# EAGLE board PCB_Schema_Electrica (EAGLE 9.7.0)
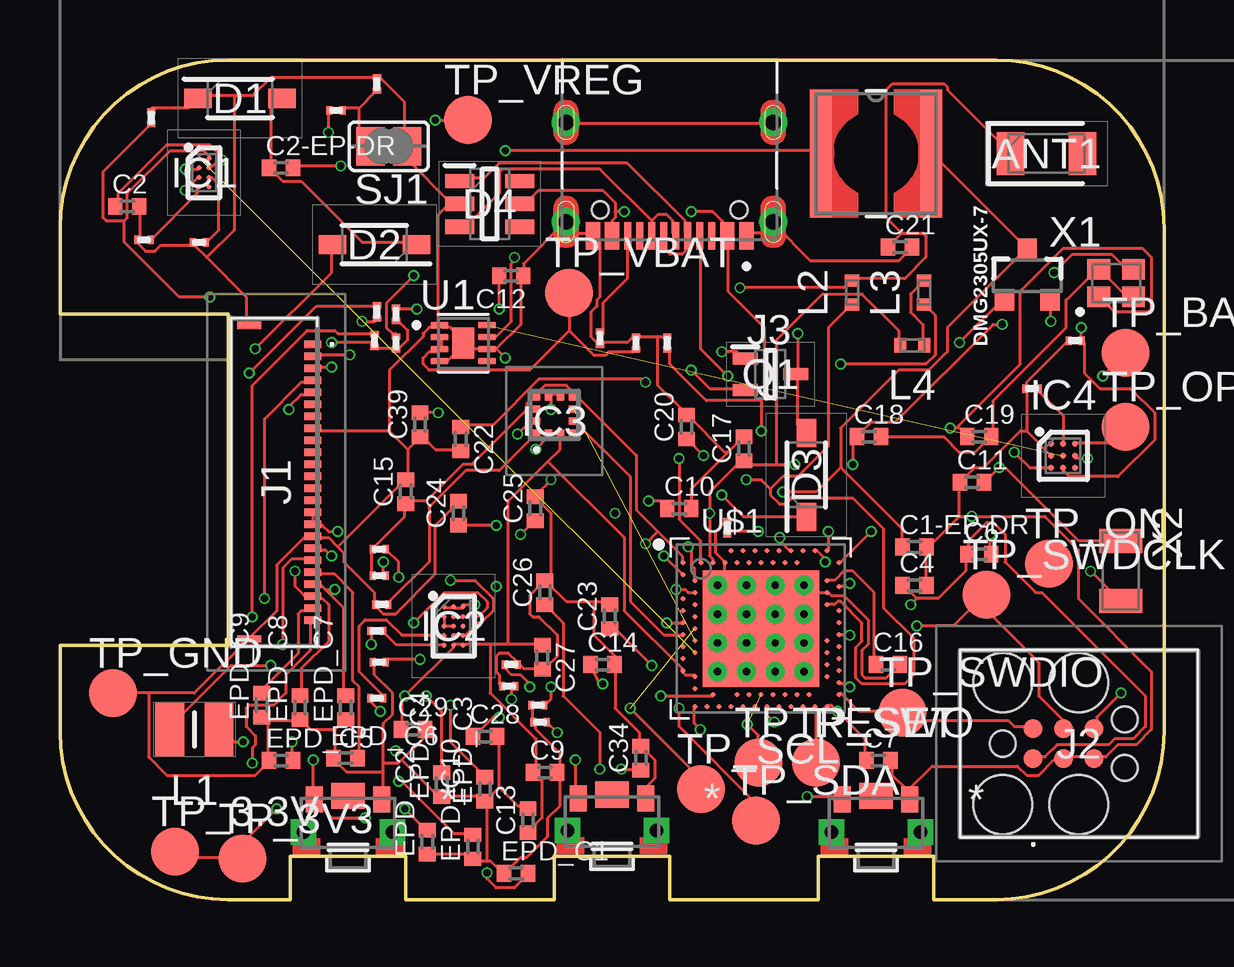
[diagram p0: board, top side]
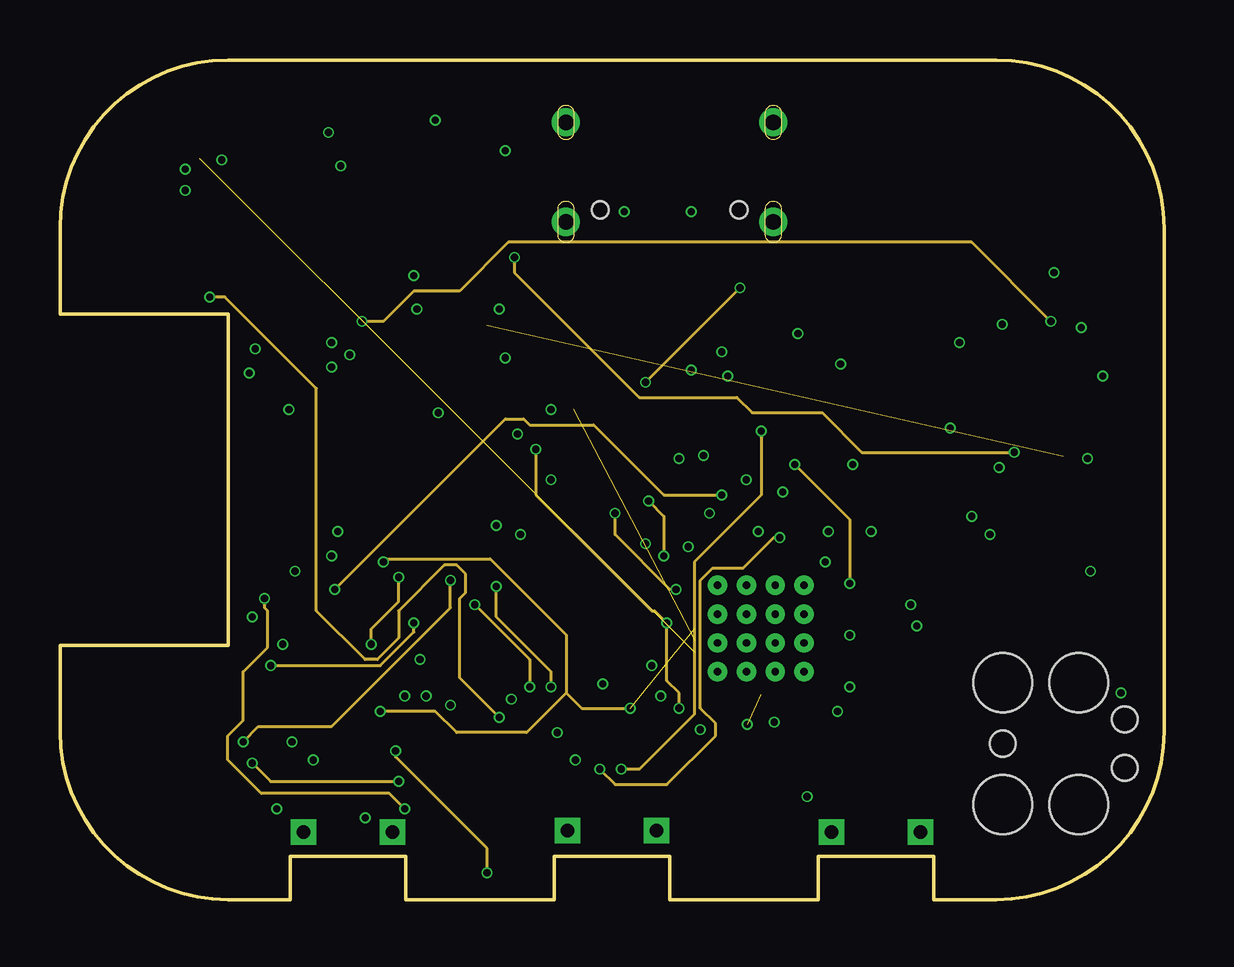
[diagram p1: board, inner layer Route15]
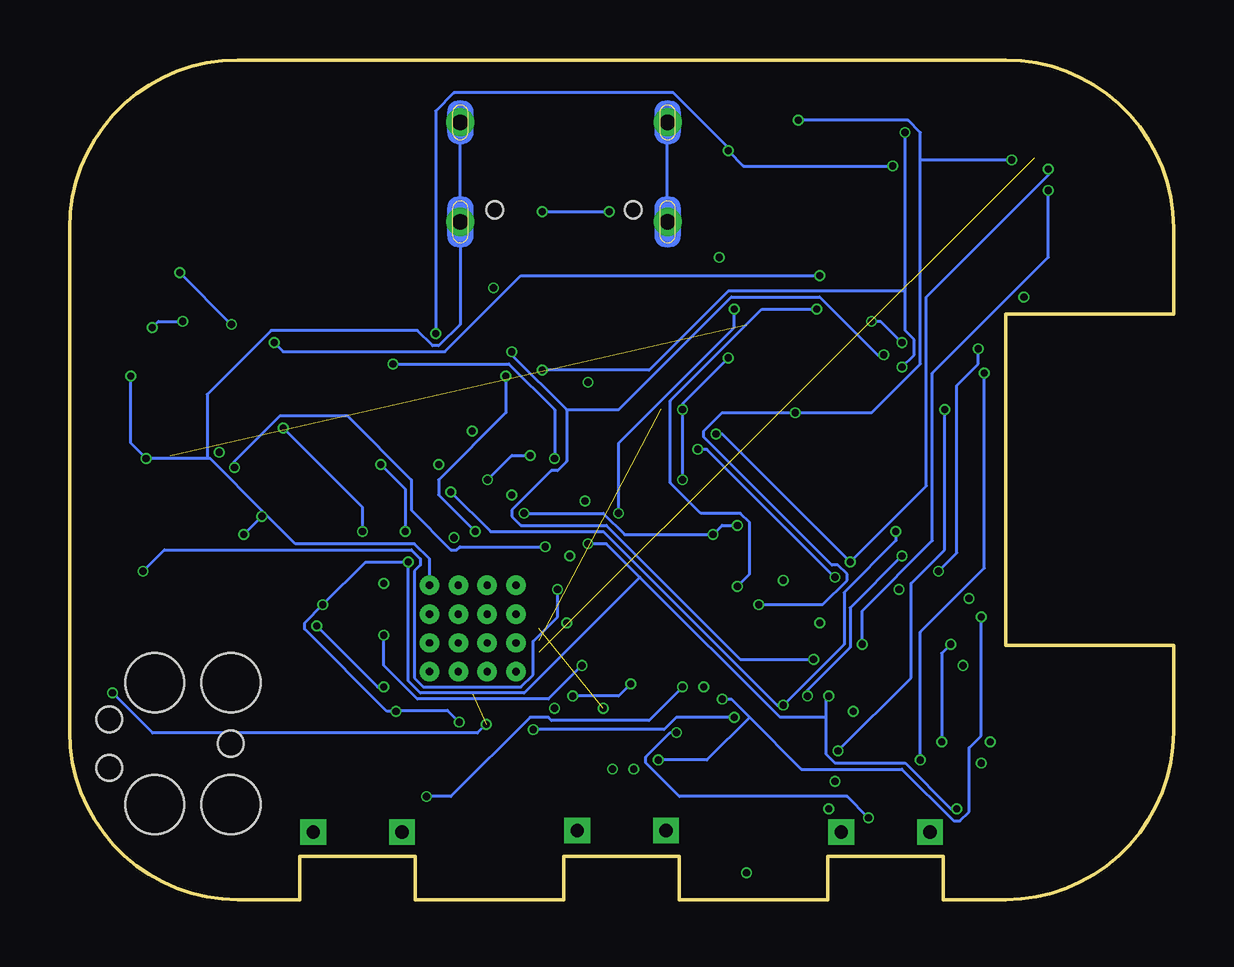
[diagram p2: board, bottom side, seen from below]

Size 46 x 35 mm. Coordinates in mm from the lower left corner, seen from the top.
Outline: 39,0 36.4,0 36.4,1.8 31.6,1.8 31.6,0 25.4,0 25.4,1.8 20.6,1.8 20.6,0 14.4,0 14.4,1.8 9.6,1.8 9.6,0 7,0 arc-90 0,7 0,10.6 7,10.6 7,24.4 0,24.4 0,28 arc-90 7,35 39,35 arc-90 46,28 46,7 arc-90 39,0
Copper layers (1+2*15+16): Top 0.035mm / dielectric 1.6mm / Route2 0.035mm / dielectric 0.15mm / Route15 0.035mm / dielectric 0.2mm / Bottom 0.035mm
Design rules "jlcpcb-2layers.dru *": minimum track width 5mil, minimum drill 0.2mm, track to track 5mil, track to pad 5mil, pad to pad 5mil, via to via 5mil, smd to smd 5mil, copper to edge 0.2mm, drill to drill 6mil, minimum pad ring 10mil, minimum via ring 3mil, stop-mask expansion 4mil, vias tented up to drill 999mm, thermal gap 10mil

## Footprints (pad centres in the part's own frame; a part is rotated, then mirrored left to right if it is on the bottom)
2450AT18B100E_ANTC3216X140N = smd 1.15 x 1.8: 1 -1.5,0; 2 1.5,0
GRM011R60J152KE01L_1_0201 = smd 0.35 x 0.25: 1 0,0.275; 2 0,-0.275
PERFECT_0402_0402 = smd 0.6 x 0.7: 1 -0.5,0; 2 0.5,0
ESP32_C6_LIBRARY_5_SOD3716X135N = smd 1.15 x 0.8: 1 -1.75,0; 2 1.75,0
ESP32_C6_LIBRARY_3_SOT95P280X145-6N = smd 1.2 x 0.6: 1 -1.25,0.95; 2 -1.25,0; 3 -1.25,-0.95; 4 1.25,-0.95; 5 1.25,0; 6 1.25,0.95
ESP32_C6_LIBRARY_4_ESP32_C6_LIBRARY_4_ESP32_C6_LIBRARY_4_ESP32_C6_LIBRARY_4_ESP32_WROVER_SPARKFUN-DISCRETESEMI_SOT23-3 = smd 0.8 x 0.9: 1 -0.95,-1; 2 0.95,-1; 3 0,1.1
BQ25180YBGR_BGA8C40P2X4_100X155X50 = smd 0.2 x 0.2: A1 -0.2,0.6; A2 0.2,0.6; B1 -0.2,0.2; B2 0.2,0.2; C1 -0.2,-0.2; C2 0.2,-0.2; D1 -0.2,-0.6; D2 0.2,-0.6
RT6160AWSC_BGA15C40P3X5_140X230X60 = smd 0.216 x 0.216: A1 -0.4,0.8; A2 0,0.8; A3 0.4,0.8; B1 -0.4,0.4; B2 0,0.4; B3 0.4,0.4; C1 -0.4,0; C2 0,0; C3 0.4,0; D1 -0.4,-0.4; D2 0,-0.4; D3 0.4,-0.4; E1 -0.4,-0.8; E2 0,-0.8; E3 0.4,-0.8
BMA423_BMA423 = smd 0.3 x 0.35: 1 -0.75,-0.775; 2 -0.25,-0.775; 3 0.25,-0.775; 4 0.75,-0.775; 7 0.75,0.775; 8 0.25,0.775; 9 -0.25,0.775; 10 -0.75,0.775 | smd 0.35 x 0.3: 5 0.775,-0.25; 6 0.775,0.25; 11 -0.775,0.25; 12 -0.775,-0.25
DRV2605YZFR_BGA9C50P3X3_144X144X62 = smd 0.25 x 0.25: A1 -0.5,0.5; A2 0,0.5; A3 0.5,0.5; B1 -0.5,0; B2 0,0; B3 0.5,0; C1 -0.5,-0.5; C2 0,-0.5; C3 0.5,-0.5
503480-2400_5034802400 = smd 0.3 x 0.7: 1 -5.75,1.525; 2 -5.25,1.525; 3 -4.75,1.525; 4 -4.25,1.525; 5 -3.75,1.525; 6 -3.25,1.525; 7 -2.75,1.525; 8 -2.25,1.525; 9 -1.75,1.525; 10 -1.25,1.525; 11 -0.75,1.525; 12 -0.25,1.525; 13 0.25,1.525; 14 0.75,1.525; 15 1.25,1.525; 16 1.75,1.525; 17 2.25,1.525; 18 2.75,1.525; 19 3.25,1.525; 20 3.75,1.525; 21 4.25,1.525; 22 4.75,1.525; 23 5.25,1.525; 24 5.75,1.525 | smd 0.3 x 1: MP1 -6.54,-1.125; MP2 6.54,-1.125
TC2030-IDC_TC2030IDC = smd 0.783 x 0.783: 1 -0.953,-0.635; 2 -0.953,0.635; 3 0.317,-0.635; 4 0.317,0.635; 5 1.588,-0.635; 6 1.588,0.635 | hole 2.451: -2.223,-2.54; -2.223,2.54; 0.952,-2.54; 0.952,2.54 | hole 1.067: -2.223,0; 2.857,-1.016; 2.857,1.016
KH-TYPE-C-16P_KINGHELM_KH-TYPE-C-16P = smd 0.6 x 1.15: A1_B12 -3.2,4.725; A4_B9 -2.4,4.725; A9_B4 2.4,4.725; A12_B1 3.2,4.725 | smd 0.3 x 1.15: A5 -1.25,4.725; A6 -0.25,4.725; A7 0.25,4.725; A8 1.25,4.725; B5 1.75,4.725; B6 0.75,4.725; B7 -0.75,4.725; B8 -1.75,4.725 | drill 0.65 pad 1.05: SH1 -4.32,0; SH2 4.32,0; SH3 -4.32,4.15; SH4 4.32,4.15 | hole 0.7: -2.89,3.65; 2.89,3.65
MLP2016SR47MT0S1_INDC2016X100N = smd 1.2 x 2.2: 1 -1.028,0; 2 1.028,0
NORDIC_NRF_2_RESC0402_L = smd 0.5 x 0.6: 1 -0.5,0; 2 0.5,0
ESP32_C6_LIBRARY_2_IND_4828-WE-TPC_WRE = smd 0.9 x 5.3: 1 -2.286,0; 2 2.286,0
ESP32_C6_LIBRARY_6_SOT65P210X110-3N = smd 1.05 x 0.5: 1 -1.05,0.65; 2 -1.05,-0.65; 3 1.05,0
CPF0201D7K68C1_0201 = smd 0.35 x 0.25: 1 0,0.275; 2 0,-0.275
ERA-1AEB3401C_0201 = smd 0.35 x 0.25: 1 0,0.275; 2 0,-0.275
ESP32_C6_LIBRARY_7_JUMPER_SJ = smd 1.168 x 1.6: 1 -0.762,0; 2 0.762,0
2025-10-22_07-23-44_LIBRARY_SW_EVP-AKE31A_PAN = smd 0.711 x 1.092: 1 -1.4,-0.972; 2 1.4,-0.972 | drill 0.559 pad 0.914 square: 3 -1.848,0.381; 4 1.848,0.381 | smd 1.397 x 1.092: 5 0,-1.124
HECTOR_WATCH_1_TP20R = smd 2 x 2: TP 0,0
ESP32_C6_LIBRARY_SON50P200X200X80-9N = smd 0.76 x 0.27: 1 -0.985,0.75; 2 -0.985,0.25; 3 -0.985,-0.25; 4 -0.985,-0.75; 5 0.985,-0.75; 6 0.985,-0.25; 7 0.985,0.25; 8 0.985,0.75 | smd 0.9 x 1.3: 9 0,0
NORDIC_NRF_4_AQFN50P700X700X85_HS-74N = smd 4.85 x 4.85: P$74 0,0 | drill 0.3 pad 0.6: P$75 -1.8,1.8; P$76 -0.6,1.8; P$77 0.6,1.8; P$78 1.8,1.8; P$79 -1.8,0.6; P$80 -0.6,0.6; P$81 0.6,0.6; P$82 1.8,0.6; P$83 -1.8,-0.6; P$84 -0.6,-0.6; P$85 0.6,-0.6; P$86 1.8,-0.6; P$87 -1.8,-1.8; P$88 -0.6,-1.8; P$89 0.6,-1.8; P$90 1.8,-1.8 | smd 0.2 x 0.2: P$A8 -1.25,3.25; P$A10 -0.75,3.25; P$A12 -0.25,3.25; P$A14 0.25,3.25; P$A16 0.75,3.25; P$A18 1.25,3.25; P$A20 1.75,3.25; P$A22 2.25,3.25; P$A23 2.75,3.25; P$AA24 3.25,-2.25; P$AB2 -2.75,-2.5; P$AC5 -2,-2.75; P$AC9 -1,-2.75; P$AC11 -0.5,-2.75; P$AC13 0,-2.75; P$AC15 0.5,-2.75; P$AC17 1,-2.75; P$AC19 1.5,-2.75; P$AC21 2,-2.75; P$AC24 3.25,-2.75; P$AD2 -2.75,-3.25; P$AD4 -2.25,-3.25; P$AD6 -1.75,-3.25; P$AD8 -1.25,-3.25; P$AD10 -0.75,-3.25; P$AD12 -0.25,-3.25; P$AD14 0.25,-3.25; P$AD16 0.75,-3.25; P$AD18 1.25,-3.25; P$AD20 1.75,-3.25; P$AD22 2.25,-3.25; P$AD23 2.75,-3.25; P$B1 -3.25,2.75; P$B3 -2.5,2.75; P$B5 -2,2.75; P$B7 -1.5,2.75; P$B9 -1,2.75; P$B11 -0.5,2.75; P$B13 0,2.75; P$B15 0.5,2.75; P$B17 1,2.75; P$B19 1.5,2.75; P$B24 3.25,2.75; P$C1 -3.25,2.25; P$D2 -2.75,2; P$D23 2.75,2; P$E24 3.25,1.75; P$F2 -2.75,1.5; P$F23 2.75,1.5; P$G1 -3.25,1.25; P$H2 -2.75,1; P$H23 2.75,1; P$J1 -3.25,0.75; P$J24 3.25,0.75; P$K2 -2.75,0.5; P$L1 -3.25,0.25; P$L24 3.25,0.25; P$M2 -2.75,0; P$N1 -3.25,-0.25; P$N24 3.25,-0.25; P$P2 -2.75,-0.5; P$P23 2.75,-0.5; P$R1 -3.25,-0.75; P$R24 3.25,-0.75; P$T2 -2.75,-1; P$T23 2.75,-1; P$U1 -3.25,-1.25; P$U24 3.25,-1.25; P$V23 2.75,-1.5; P$W1 -3.25,-1.75; P$W24 3.25,-1.75; P$Y2 -2.75,-2; P$Y23 2.75,-2
NORDIC_NRF_BT-XTAL_2016_N = smd 0.95 x 0.85: 1 -0.725,-0.575; 2 0.725,-0.575; 3 0.725,0.575; 4 -0.725,0.575
NORDIC_NRF_1_XTAL_3215_N = smd 1 x 1.8: 1 -1.25,0; 2 1.25,0

## Placement (x,y rotation side)
ANT1  2450AT18B100E  [2450AT18B100E_ANTC3216X140N]  41.1,31.1 0 top
C1  1uF  [GRM011R60J152KE01L_1_0201]  3.8,32.6 0 top
C1-EP-DR  10uF  [PERFECT_0402_0402]  35.6,14.7 0 top
C2  1uF  [PERFECT_0402_0402]  2.8,28.9 0 top
C2-EP-DR  4.7uF/25V  [PERFECT_0402_0402]  9.2,30.5 0 top
C3  1uF  [GRM011R60J152KE01L_1_0201]  5.8,27.4 90 top
C4  100nF  [PERFECT_0402_0402]  35.6,13.1 0 top
C6  22uF  [PERFECT_0402_0402]  38.3,14.4 0 top
C7  22uF  [PERFECT_0402_0402]  34.1,5.8 0 top
C9  4.7µF  [PERFECT_0402_0402]  20.2,5.3 0 top
C10  100nF  [PERFECT_0402_0402]  25.8,16.3 0 top
C11  12pF  [PERFECT_0402_0402]  38,17.4 0 top
C12  12pF  [PERFECT_0402_0402]  18.8,26 180 top
C13  4.7µF  [PERFECT_0402_0402]  19.5,3.3 90 top
C14  4.7µF  [PERFECT_0402_0402]  22.6,9.8 0 top
C15  100nF  [PERFECT_0402_0402]  14.4,17 90 top
C16  100nF  [PERFECT_0402_0402]  34.5,9.8 0 top
C17  N.C.  [PERFECT_0402_0402]  28.5,18.8 90 top
C18  12pF  [PERFECT_0402_0402]  33.7,19.3 0 top
C19  12pF  [PERFECT_0402_0402]  38.3,19.3 0 top
C20  1pF  [PERFECT_0402_0402]  26.1,19.7 90 top
C21  1pF  [PERFECT_0402_0402]  35,27.2 0 top
C22  N.C.  [PERFECT_0402_0402]  16.7,19.2 270 top
C23  820pF  [PERFECT_0402_0402]  22.9,11.8 90 top
C24  1.0µF  [PERFECT_0402_0402]  16.6,16.1 90 top
C25  47µF  [PERFECT_0402_0402]  19.8,16.3 90 top
C26  N.C.  [PERFECT_0402_0402]  20.2,12.8 90 top
C27  100nF  [PERFECT_0402_0402]  20.1,10.1 270 top
C28  4.7µF  [PERFECT_0402_0402]  17.7,6.8 0 top
C29  4.7µF  [PERFECT_0402_0402]  14.7,7.1 0 top
C30  1uF  [GRM011R60J152KE01L_1_0201]  40.5,21.3 90 top
C31  0.1uF  [GRM011R60J152KE01L_1_0201]  42.3,23.3 90 top
C32  0.1uF  [GRM011R60J152KE01L_1_0201]  24,23.2 0 top
C33  0.1uF  [GRM011R60J152KE01L_1_0201]  25.3,23.2 0 top
C34  4.7µF  [PERFECT_0402_0402]  24.2,5.9 90 top
C35  1uF  [GRM011R60J152KE01L_1_0201]  20,7.4 90 top
C36  1uF  [GRM011R60J152KE01L_1_0201]  19.9,8.1 90 top
C37  1uF  [GRM011R60J152KE01L_1_0201]  18.7,8.9 90 top
C38  1uF  [GRM011R60J152KE01L_1_0201]  18.8,9.8 90 top
C39  1uF  [PERFECT_0402_0402]  15,19.8 90 top
D1  MBR0530  [ESP32_C6_LIBRARY_5_SOD3716X135N]  7.5,33.4 0 top
D2  MBR0530  [ESP32_C6_LIBRARY_5_SOD3716X135N]  13.1,27.3 180 top
D3  MBR0530  [ESP32_C6_LIBRARY_5_SOD3716X135N]  31.1,17.7 90 top
D4  USBLC6-2SC6Y  [ESP32_C6_LIBRARY_3_SOT95P280X145-6N]  17.9,29 0 top
DMG2305UX-7  20V/4.2A/52mΩ/1.4W  [ESP32_C6_LIBRARY_4_ESP32_C6_LIBRARY_4_ESP32_C6_LIBRARY_4_ESP32_C6_LIBRARY_4_ESP32_WROVER_SPARKFUN-DISCRETESEMI_SOT23-3]  40.3,26 0 top
EPD_C1  1uF/50V  [PERFECT_0402_0402]  19,1.1 0 top
EPD_C2  1uF/50V  [PERFECT_0402_0402]  15.3,2.4 90 top
EPD_C3  0.1uF/50V  [PERFECT_0402_0402]  17.7,4.6 90 top
EPD_C4  1uF/50V  [PERFECT_0402_0402]  15.9,4.8 90 top
EPD_C5  1uF/50V  [PERFECT_0402_0402]  9.2,5.8 0 top
EPD_C6  1uF/50V  [PERFECT_0402_0402]  11.9,5.9 0 top
EPD_C7  1uF/50V  [PERFECT_0402_0402]  11.9,8 90 top
EPD_C8  1uF/50V  [PERFECT_0402_0402]  10,8 90 top
EPD_C9  1uF/50V  [PERFECT_0402_0402]  8.4,8.1 90 top
EPD_C10  1uF/50V  [PERFECT_0402_0402]  17.2,2.2 90 top
IC1  BQ25180YBGR_BQ25180YBGR  [BQ25180YBGR_BGA8C40P2X4_100X155X50]  6,30.3 0 top
IC2  RT6160AWSC_RT6160AWSC  [RT6160AWSC_BGA15C40P3X5_140X230X60]  16.4,11.4 0 top
IC3  BMA423_BMA423  [BMA423_BMA423]  20.6,20.2 0 top
IC4  DRV2605YZFR  [DRV2605YZFR_BGA9C50P3X3_144X144X62]  41.8,18.5 0 top
J1  503480-2400_503480-2400  [503480-2400_5034802400]  9,17.4 270 top
J2  TC2030-IDC  [TC2030-IDC_TC2030IDC]  41.5,6.5 0 top
J3  KH-TYPE-C-16P  [KH-TYPE-C-16P_KINGHELM_KH-TYPE-C-16P]  25.4,32.4 180 top
L1  MLP2016SR47MT0S1_FTC252012SR47MBCA  [MLP2016SR47MT0S1_INDC2016X100N]  5.6,7.1 0 top
L2  3.9nH  [NORDIC_NRF_2_RESC0402_L]  33,25.3 90 top
L3  10µH  [NORDIC_NRF_2_RESC0402_L]  36,25.3 90 top
L4  15µH  [NORDIC_NRF_2_RESC0402_L]  35.5,23.1 180 top
L5  68uH  [ESP32_C6_LIBRARY_2_IND_4828-WE-TPC_WRE]  34,31.1 0 top
Q1  SI1308EDL-T1-GE3  [ESP32_C6_LIBRARY_6_SOT65P210X110-3N]  29.6,21.9 0 top
R1  10K  [CPF0201D7K68C1_0201]  3.5,27.5 90 top
R1_EP_DR  0.47  [CPF0201D7K68C1_0201]  11.5,32.9 270 top
R1_USB  5K1  [CPF0201D7K68C1_0201]  27.8,15.5 0 top
R1_USB1  5K1  [CPF0201D7K68C1_0201]  22.5,23.4 0 top
R2  0  [CPF0201D7K68C1_0201]  13.2,8.4 90 top
R2_EP_DR  10K  [CPF0201D7K68C1_0201]  13.3,9.9 90 top
R3  0  [CPF0201D7K68C1_0201]  13.2,11.2 90 top
R4  0  [ERA-1AEB3401C_0201]  13.4,12.3 90 top
R5  3K3  [CPF0201D7K68C1_0201]  13.3,13.5 90 top
R6  3K3  [CPF0201D7K68C1_0201]  13.3,14.6 90 top
R7  10k  [ERA-1AEB3401C_0201]  13.2,24.5 0 top
R8  10k  [ERA-1AEB3401C_0201]  14,24.4 0 top
R9  10k  [ERA-1AEB3401C_0201]  13.1,23.3 0 top
R_PWR_EPD  10K  [CPF0201D7K68C1_0201]  14,23.2 0 top
R_TYPE_SEL  2.2  [CPF0201D7K68C1_0201]  13.2,34 0 top
SJ1  [ESP32_C6_LIBRARY_7_JUMPER_SJ]  13.7,31.4 180 top
SW1  2025-10-22_07-23-44_LIBRARY_EVP-AKE31ASW_EVP-AKE31A_PAN  [2025-10-22_07-23-44_LIBRARY_SW_EVP-AKE31A_PAN]  12,3.2 180 top
SW2  2025-10-22_07-23-44_LIBRARY_EVP-AKE31ASW_EVP-AKE31A_PAN  [2025-10-22_07-23-44_LIBRARY_SW_EVP-AKE31A_PAN]  34,3.2 180 top
SW3  2025-10-22_07-23-44_LIBRARY_EVP-AKE31ASW_EVP-AKE31A_PAN  [2025-10-22_07-23-44_LIBRARY_SW_EVP-AKE31A_PAN]  23,3.25 180 top
TP_3.3V  HECTOR_WATCH_1_TPTP20R  [HECTOR_WATCH_1_TP20R]  4.8,2 0 top
TP_3V3  HECTOR_WATCH_1_TPTP20R  [HECTOR_WATCH_1_TP20R]  7.6,1.7 0 top
TP_BAT_GND  HECTOR_WATCH_1_TPTP20R  [HECTOR_WATCH_1_TP20R]  44.4,22.8 0 top
TP_GND  HECTOR_WATCH_1_TPTP20R  [HECTOR_WATCH_1_TP20R]  2.2,8.6 0 top
TP_ON  HECTOR_WATCH_1_TPTP20R  [HECTOR_WATCH_1_TP20R]  41.2,14 0 top
TP_OP  HECTOR_WATCH_1_TPTP20R  [HECTOR_WATCH_1_TP20R]  44.4,19.7 0 top
TP_RESET  HECTOR_WATCH_1_TPTP20R  [HECTOR_WATCH_1_TP20R]  29.1,5.7 0 top
TP_SCL  HECTOR_WATCH_1_TPTP20R  [HECTOR_WATCH_1_TP20R]  26.7,4.6 0 top
TP_SDA  HECTOR_WATCH_1_TPTP20R  [HECTOR_WATCH_1_TP20R]  29,3.3 0 top
TP_SWDCLK  HECTOR_WATCH_1_TPTP20R  [HECTOR_WATCH_1_TP20R]  38.6,12.7 0 top
TP_SWDIO  HECTOR_WATCH_1_TPTP20R  [HECTOR_WATCH_1_TP20R]  35.1,7.8 0 top
TP_SWO  HECTOR_WATCH_1_TPTP20R  [HECTOR_WATCH_1_TP20R]  31.5,5.7 0 top
TP_VBAT  HECTOR_WATCH_1_TPTP20R  [HECTOR_WATCH_1_TP20R]  21.2,25.3 0 top
TP_VREG  HECTOR_WATCH_1_TPTP20R  [HECTOR_WATCH_1_TP20R]  17,32.5 0 top
U1  MAX17048G+T10  [ESP32_C6_LIBRARY_SON50P200X200X80-9N]  16.8,23.2 0 top
U$1  NRF52840_QF  [NORDIC_NRF_4_AQFN50P700X700X85_HS-74N]  29.2,11.3 0 top
X1  32MHz  [NORDIC_NRF_BT-XTAL_2016_N]  44,25.7 0 top
X2  32.768kHz  [NORDIC_NRF_1_XTAL_3215_N]  44.2,13.7 270 top

## Library data of the parts
ANT1 = InkTime_v5; ARROW_PART_NUMBER: 2450AT18B100E; ARROW_PRICE-STOCK: https://www.arrow.com/en/products/2450at18b100e/johanson-dielectrics?utm_currency=USD&region=nac; DESCRIPTION: Antennas 2.45GHz ANTENNA; HEIGHT: 1.4mm; MANUFACTURER_NAME: JOHANSON TECHNOLOGY; MANUFACTURER_PART_NUMBER: 2450AT18B100E; MOUSER_PART_NUMBER: 609-2450AT18B100E; MOUSER_PRICE-STOCK: https://www.mouser.co.uk/ProductDetail/Johanson-Technology/2450AT18B100E?qs=yCnrNFeXz%252Bh5MFsFIXGZGA%3D%3D
C1 C1-EP-DR C2 C2-EP-DR C3 C4 C6 C7 C9-C39 EPD_C1-EPD_C10 L2-L4 R1 R1_EP_DR R1_USB R1_USB1 R2 R2_EP_DR R3-R9 R_PWR_EPD R_TYPE_SEL SJ1 TP_3.3V TP_3V3 TP_BAT_GND TP_GND TP_ON TP_OP TP_RESET TP_SCL TP_SDA TP_SWDCLK TP_SWDIO TP_SWO TP_VBAT TP_VREG U$1 X1 X2 = InkTime_v5
D1-D3 = InkTime_v5; AVAILABILITY: In Stock; CHECK_PRICES: https://www.snapeda.com/parts/MBR0530/Onsemi/view-part/?ref=eda; DESCRIPTION: Diode Schottky 30 V 500mA Surface Mount SOD-123; MF: ON Semiconductor; MP: MBR0530; PACKAGE: SOD-123-2 ON Semiconductor; PRICE: None; PURCHASE-URL: https://www.snapeda.com/api/url_track_click_mouser/?unipart_id=179458&manufacturer=ON Semiconductor&part_name=MBR0530&search_term=None; SNAPEDA_LINK: https://www.snapeda.com/parts/MBR0530/Onsemi/view-part/?ref=snap
D4 = InkTime_v5; AVAILABILITY: In Stock; CHECK_PRICES: https://www.snapeda.com/parts/USBLC6-2SC6Y/STMicroelectronics/view-part/?ref=eda; DESCRIPTION: 17V Clamp 5A (8/20µs) Ipp Tvs Diode Surface Mount SOT-23-6; MF: STMicroelectronics; MP: USBLC6-2SC6Y; PACKAGE: SOT-23-6 STMicroelectronics; PRICE: None; SNAPEDA_LINK: https://www.snapeda.com/parts/USBLC6-2SC6Y/STMicroelectronics/view-part/?ref=snap
DMG2305UX-7 = InkTime_v5; PROD_ID: TRAN-14388
IC1 = InkTime_v5; ARROW_PART_NUMBER: BQ25180YBGR; ARROW_PRICE-STOCK: https://www.arrow.com/en/products/bq25180ybgr/texas-instruments?utm_currency=USD&region=nac; DESCRIPTION: Charger IC Lithium Ion/Polymer, Lithium Iron Phosphate 8-DSBGA (1.6x1.1); HEIGHT: 0.5mm; MANUFACTURER_NAME: Texas Instruments; MANUFACTURER_PART_NUMBER: BQ25180YBGR; MOUSER_PART_NUMBER: 595-BQ25180YBGR; MOUSER_PRICE-STOCK: https://www.mouser.co.uk/ProductDetail/Texas-Instruments/BQ25180YBGR?qs=doiCPypUmgEWjAK%252BJAX6Tw%3D%3D
IC2 = InkTime_v5; DESCRIPTION: Buck-Boost Regulator Positive Output Step-Up/Step-Down I2C DC-DC Controller IC 15-WL-CSP (BSC) (1.4x2.3); HEIGHT: 0.6mm; MANUFACTURER_NAME: RICHTEK; MANUFACTURER_PART_NUMBER: RT6160AWSC; MOUSER_PART_NUMBER: 835-RT6160AWSC; MOUSER_PRICE-STOCK: https://www.mouser.co.uk/ProductDetail/Richtek/RT6160AWSC?qs=amGC7iS6iy%2FLd9PSoixZXQ%3D%3D
IC3 = InkTime_v5; ARROW_PART_NUMBER: BMA423; ARROW_PRICE-STOCK: https://www.arrow.com/en/products/bma423/bosch; DESCRIPTION: Accelerometers Triaxial low-g 12bit Acceleration Sensor; HEIGHT: 1mm; MANUFACTURER_NAME: BOSCH; MANUFACTURER_PART_NUMBER: BMA423; MOUSER_PART_NUMBER: 262-BMA423; MOUSER_PRICE-STOCK: https://www.mouser.co.uk/ProductDetail/Bosch-Sensortec/BMA423?qs=HXFqYaX1Q2xC%252BSgeGoX3mg%3D%3D
IC4 = InkTime_v5; ARROW_PART_NUMBER: DRV2605YZFR; ARROW_PRICE-STOCK: https://www.arrow.com/en/products/drv2605yzfr/texas-instruments?region=nac; DESCRIPTION: Haptic Driver for ERM/LRA with Built-In Library and Smart Loop Architecture; HEIGHT: 0.625mm; MANUFACTURER_NAME: Texas Instruments; MANUFACTURER_PART_NUMBER: DRV2605YZFR
J1 = InkTime_v5; DESCRIPTION: FFC & FPC Connectors 0.5mm FPC RA SMT Dual Contact 24Ckt; HEIGHT: 1.87mm; MANUFACTURER_NAME: Molex; MANUFACTURER_PART_NUMBER: 503480-2400; MOUSER_PART_NUMBER: 538-503480-2400; MOUSER_PRICE-STOCK: https://www.mouser.co.uk/ProductDetail/Molex/503480-2400?qs=OAhjpuo3Vu7efIoxFh9AOw%3D%3D
J2 = InkTime_v5; DESCRIPTION: CABLE ADAPTER 6 POS; HEIGHT: 19mm; MANUFACTURER_NAME: Tag Connect; MANUFACTURER_PART_NUMBER: TC2030-IDC
J3 = InkTime_v5; AVAILABILITY: Not in stock; CHECK_PRICES: https://www.snapeda.com/parts/KH-TYPE-C-16P/Kinghelm/view-part/?ref=eda; MF: kinghelm; MP: KH-TYPE-C-16P; PACKAGE: None; PRICE: None; SNAPEDA_LINK: https://www.snapeda.com/parts/KH-TYPE-C-16P/Kinghelm/view-part/?ref=snap
L1 = InkTime_v5; DESCRIPTION: SMD / SMT Inductors (Coils), L=0.47?H, L x W x T :; HEIGHT: 1mm; JLCPCB: https://jlcpcb.com/partdetail/6763488-FTC252012SR47MBCA/C5832368; MANUFACTURER_NAME: TDK; MANUFACTURER_PART_NUMBER: FTC252012SR47MBCA
L5 = InkTime_v5; COPYRIGHT: Copyright (C) 2024 Ultra Librarian. All rights reserved.; MANUFACTURER_PART_NUMBER: 744043680; MFR_NAME: Wurth Electronics
Q1 = InkTime_v5; AVAILABILITY: In Stock; CHECK_PRICES: https://www.snapeda.com/parts/SI1308EDL-T1-GE3/Vishay+Siliconix/view-part/?ref=eda; DESCRIPTION: Si1308EDL-T1-GE3 N-channel MOSFET Transistor, 1.5 A, 30 V, 3-Pin SC-70 | Siliconix / Vishay SI1308EDL-T1-GE3; MF: Vishay Siliconix; MP: SI1308EDL-T1-GE3; PACKAGE: SOT-323 Vishay Semiconductor; PRICE: None; PURCHASE-URL: https://www.snapeda.com/api/url_track_click_mouser/?unipart_id=274603&manufacturer=Vishay Siliconix&part_name=SI1308EDL-T1-GE3&search_term=None; SNAPEDA_LINK: https://www.snapeda.com/parts/SI1308EDL-T1-GE3/Vishay+Siliconix/view-part/?ref=snap
SW1-SW3 = InkTime_v5; COPYRIGHT: Copyright (C) 2025 Ultra Librarian. All rights reserved.; DIGI-KEY_PART_NUMBER_1: P123437TR-ND; DIGI-KEY_PART_NUMBER_2: P123437CT-ND; DIGI-KEY_PART_NUMBER_3: P123437DKR-ND; MANUFACTURER_NAME: Panasonic; MANUFACTURER_PART_NUMBER: EVP-AKE31A
U1 = InkTime_v5; AVAILABILITY: In Stock; CHECK_PRICES: https://www.snapeda.com/parts/MAX17048G+T10/Analog+Devices/view-part/?ref=eda; DESCRIPTION: 3µA 1-Cell/2-Cell Fuel Gauge with ModelGauge; MF: Analog Devices; MP: MAX17048G+T10; PACKAGE: TDFN-8 Maxim; PRICE: None; PURCHASE-URL: https://www.snapeda.com/api/url_track_click_mouser/?unipart_id=329239&manufacturer=Analog Devices&part_name=MAX17048G+T10&search_term=None; SNAPEDA_LINK: https://www.snapeda.com/parts/MAX17048G+T10/Analog+Devices/view-part/?ref=snap

## Nets
3V3/1.7D: C31.2 DMG2305UX-7.2 IC4.C2 R7.2 R8.2 R9.2 R_PWR_EPD.2
3V3/2.4A: C4.1 C6.1 C7.1 C9.1 C13.1 C15.1 C27.1 C29.1 IC2.E2 IC2.E3 IC3.3 IC3.7 IC3.10 J2.1 R5.1 R6.1 TP_3.3V.TP TP_3V3.TP U$1.P$A22 U$1.P$AD14 U$1.P$AD23 U$1.P$B1 U$1.P$W1 U$1.P$Y2
ALERT/1.6C: U1.5
ALERT/2.5C: U$1.P$J24
D+/1.5D: D4.4
D+/2.7D: U$1.P$AD6
D-/1.5D: D4.6
D-/2.7D: U$1.P$AD4
DEC3: C16.1 U$1.P$D23
DN: D4.1 J3.A7 J3.B7
DP: D4.3 J3.A6 J3.B6
EPD_3V3: C1-EP-DR.1 DMG2305UX-7.3 EPD_C3.2 J1.15 J1.16 L5.2
EPD_BUSY/1.5D: J1.9
EPD_BUSY/2.2D: U$1.P$AD12
EPD_CS/1.4C: J1.12
EPD_CS/2.2D: U$1.P$K2
EPD_DC/1.5D: J1.11
EPD_DC/2.2D: U$1.P$AD10
EPD_RST/1.5D: J1.10
EPD_RST/2.2D: U$1.P$AC11
GDR: J1.2 Q1.1 R2_EP_DR.2
GND: C1-EP-DR.2 C1.1 C2.2 C3.1 C4.2 C6.2 C7.2 C9.2 C10.2 C11.1 C12.1 C13.2 C14.2 C15.2 C16.2 C17.2 C20.2 C21.2 C22.2 C23.2 C24.2 C25.2 C26.2 C27.2 C28.2 C29.2 C30.1 C31.1 C32.1 C33.1 C34.2 C35.1 C36.1 C37.1 C38.2 C39.1 D1.1 D4.2 EPD_C1.1 EPD_C2.1 EPD_C3.1 EPD_C4.1 EPD_C5.1 EPD_C6.1 EPD_C7.1 EPD_C8.1 EPD_C9.1 EPD_C10.1 IC3.8 IC3.9 IC4.B1 IC4.B3 J1.8 J1.17 J1.MP1 J1.MP2 J2.3 J2.5 J3.A1_B12 J3.A12_B1 J3.SH1 J3.SH2 J3.SH3 J3.SH4 R1.1 R1_USB1.2 R1_USB.1 R2_EP_DR.1 R4.1 R_TYPE_SEL.1 SJ1.1 SW1.1 SW2.1 SW3.1 TP_BAT_GND.TP TP_GND.TP U1.1 U1.4 U1.6 U1.9 U$1.P$74 U$1.P$75 U$1.P$76 U$1.P$77 U$1.P$78 U$1.P$79 U$1.P$80 U$1.P$81 U$1.P$82 U$1.P$83 U$1.P$84 U$1.P$85 U$1.P$86 U$1.P$87 U$1.P$88 U$1.P$89 U$1.P$90 U$1.P$B7 U$1.P$F23
HAPTIC_EN/1.4C: IC4.A1
HAPTIC_EN/2.6A: U$1.P$U1
IMU_INT1: IC3.5 U$1.P$N1
IMU_INT2: IC3.6 U$1.P$P2
LX1: IC2.B2 IC2.B3 L1.1
LX2: IC2.D2 IC2.D3 L1.2
MOSI/1.5B: J1.14
MOSI/2.2D: U$1.P$B13
N$1: IC1.D1 R1.2
N$2: IC2.D1 R2.2
N$3: IC2.E1 R3.2
N$4: IC3.1 R4.2
N$5: IC2.B1 IC2.C1 IC2.C2
N$8: IC2.C3
N$15: C10.1 U$1.P$C1
N$16: C11.2 U$1.P$D2 X2.1
N$17: C12.2 U$1.P$F2 X2.2
N$18: C14.1 U$1.P$AC5
N$19: C17.1 C24.1 C25.1 L4.2 U$1.P$B5 U$1.P$E24
N$20: C18.1 U$1.P$A23 X1.3
N$21: C18.2 C19.2 X1.2 X1.4
N$22: C19.1 U$1.P$B24 X1.1
N$23: C20.1 L2.1 U$1.P$H23
N$24: ANT1.1 C21.1 C22.1 L2.2
N$25: C23.1 U$1.P$N24
N$26: L3.1 U$1.P$B3
N$27: C26.1 U$1.P$A18
N$28: L3.2 L4.1
N$29: C2-EP-DR.1 D1.2 D2.1
N$30: C2-EP-DR.2 D3.2 L5.1 Q1.3
N$31: EPD_C2.2 J1.4
N$33: EPD_C1.2 J1.5
N$34: EPD_C4.2 J1.18
N$35: EPD_C5.2 J1.19
N$36: EPD_C6.2 J1.20
N$37: J3.A5 R1_USB.2
N$38: R1_EP_DR.1 R_TYPE_SEL.2 SJ1.2
N$39: EPD_C9.2 J1.23
N$40: EPD_C10.2 J1.24
N$42: C30.2 IC4.A2
N$46: IC4.C3
N$47: J3.B5 R1_USB1.1
OUT+: IC4.A3 TP_OP.TP
OUT-: TP_ON.TP
P0.04: U$1.P$J1
P0.09: U$1.P$L24
P0.13/1.5D: C35.2 R7.1 SW1.2
P0.13/2.6C: U$1.P$AD8
P0.14/1.5D: C36.2 R8.1 SW2.2
P0.14/2.7C: U$1.P$AC9
P0.19: U$1.P$AC15
P0.20: U$1.P$AD16
P0.21: U$1.P$AC17
P0.22: U$1.P$AD18
P0.23: U$1.P$AC19
P0.24: U$1.P$AD20
P0.25: U$1.P$AC21
P0.26: U$1.P$G1
P0.27: U$1.P$H2
P0.28: U$1.P$B11
P0.29: U$1.P$A10
P0.30: U$1.P$B9
P0.31: U$1.P$A8
P1.01/1.6C: DMG2305UX-7.1 R_PWR_EPD.1
P1.01/2.4B: U$1.P$Y23
P1.02/1.6C: C37.2 R9.1 SW3.2
P1.02/2.8C: U$1.P$W24
P1.03: U$1.P$V23
P1.04: U$1.P$U24
P1.05: U$1.P$T23
P1.06: U$1.P$R24
P1.07: U$1.P$P23
P1.09: U$1.P$R1
P1.10: U$1.P$A20
P1.11: U$1.P$B19
P1.12: U$1.P$B17
P1.13: U$1.P$A16
P1.14: U$1.P$B15
P1.15: U$1.P$A14
PMIC_INT: IC1.A1 U$1.P$T2
PREVGH: D3.1 EPD_C7.2 J1.21
PREVGL: D2.2 EPD_C8.2 J1.22
RESE: J1.3 Q1.2 R1_EP_DR.2
RESET: J2.6 TP_RESET.TP U$1.P$AC13
SCK/1.5B: J1.13
SCK/2.2D: U$1.P$A12
SCL/1.4C: IC4.C1 U1.7
SCL/2.4C: IC1.B1 IC3.12 R2.1 R5.2 TP_SCL.TP U$1.P$M2
SDA/1.4C: IC4.B2 U1.8
SDA/2.4C: IC1.C1 IC3.2 R3.1 R6.2 TP_SDA.TP U$1.P$L1
SWDCLK: J2.4 TP_SWDCLK.TP U$1.P$AA24
SWDIO: J2.2 TP_SWDIO.TP U$1.P$AC24
SWO: TP_SWO.TP U$1.P$AD22
VBAT/1.2A: C32.2 TP_VBAT.TP U1.2 U1.3
VBAT/2.5C: C3.2 IC1.C2
VBUS/1.5D: C33.2 C34.1 D4.5 J3.A4_B9 J3.A9_B4
VBUS/2.6D: C1.2 C28.1 IC1.A2 U$1.P$AD2
VREG: C2.1 C38.1 C39.2 IC1.B2 IC2.A1 IC2.A2 IC2.A3 TP_VREG.TP

## Tracks (layer width: path | path; a pad name or v marks a point on that pad's centre or on a via)
3V3/1.7D  (via drill 0.3)
  Top 0.127: R8.2 14.11,24.1 14.49,23.72 14.49,23.34 14.11,22.96 R_PWR_EPD.2 13.98,22.96 13.22,22.96 R9.2 13.09,23.09 12.97,23.21 v11.32,23.21 | v12.59,24.1 13.09,24.1 R7.2 | IC4.C2 41.8,17.88 42.05,17.63 44.08,17.63 45.61,19.15 45.61,20.29 44.59,21.31 43.32,21.31 42.69,21.95 42.69,23.21 C31.2 42.56,23.34 v42.56,23.85 | v41.29,24.1 41.29,24.99 DMG2305UX-7.2
  Route15 0.127: v12.59,24.1 13.47,24.1 14.74,25.37 16.65,25.37 18.68,27.41 37.99,27.41 v41.29,24.1
  Bottom 0.127: v12.59,24.1 12.21,24.1 v11.32,23.21 | v41.29,24.1 42.3,24.1 v42.56,23.85
3V3/2.4A  (via drill 0.3)
  Top 0.127: U$1.P$AD14 29.45,7.7 v29.76,7.39 | U$1.P$AD23 32.02,8.1 32.14,8.1 v32.4,7.85 33.54,6.71 33.54,5.82 C7.1 | v31.89,14.07 31.89,14.2 31.51,14.58 U$1.P$A22 | 35.7,12.55 35.19,13.05 C4.1 | 35.7,12.55 36.59,12.55 37.73,13.69 37.73,14.32 C6.1 37.86,14.45 37.86,14.96 38.62,15.72 38.88,15.72 39.38,15.21 39.38,14.07 40.65,12.8 40.91,12.8 45.23,8.48 45.23,7.21 44.72,6.71 43.95,6.71 43.7,6.45 41.54,6.45 41.03,5.94 40.65,5.94 J2.1 | 35.7,12.55 v35.45,12.29 | R5.1 12.97,13.56 12.97,14.58 R6.1 13.09,14.71 14.36,15.98 14.36,16.48 C15.1 14.49,16.61 15.25,16.61 16.78,18.14 17.16,18.14 19.44,20.42 19.44,20.68 19.82,21.06 IC3.10 19.95,21.06 19.95,21.18 20.21,21.44 21.09,21.44 21.48,21.06 | 24.91,15.34 24.02,16.23 24.02,18.52 21.48,21.06 | 24.91,15.34 25.92,14.32 25.92,14.07 U$1.P$B1 | 21.48,21.06 IC3.7 | TP_3.3V.TP 4.84,1.88 4.97,1.75 7.51,1.75 TP_3V3.TP 7.63,1.75 7.63,2.39 v9.03,3.78 | C13.1 19.57,2.89 20.08,3.4 20.08,5.05 19.91,5.22 C9.1 19.82,5.48 19.82,6.71 17.92,8.61 17.92,10.64 | U$1.P$Y2 26.43,9.37 26.05,9.37 25.92,9.5 U$1.P$W1 25.92,9.63 23.51,12.04 23.51,15.09 20.33,18.26 | 18.68,10.64 20.08,10.64 C27.1 | 18.68,10.64 17.92,10.64 | 17.92,10.64 16.9,10.64 IC2.E3 16.78,10.64 16.4,10.64 IC2.E2 16.4,10.52 v14.36,8.48 14.24,8.36 14.24,7.21 C29.1 | 20.33,18.26 18.68,16.61 18.68,10.64 | 20.33,18.26 20.84,18.77 20.84,19.41 IC3.3 | v24.4,14.83 24.91,15.34
  Bottom 0.127: v29.76,7.39 30.26,7.89 32.35,7.89 v32.4,7.85 32.78,7.85 36.21,11.28 36.21,11.53 v35.45,12.29 33.67,14.07 v31.89,14.07 31.89,9.12 31.38,8.61 27.06,8.61 22.24,13.44 | v9.03,3.78 9.28,3.78 11.19,5.69 14.11,5.69 14.49,6.07 14.49,7.59 | 14.49,7.59 14.49,8.36 v14.36,8.48 | v24.4,14.83 23.64,14.83 22.24,13.44 | 22.24,13.44 16.4,7.59 14.49,7.59
DEC3
  Top 0.127: U$1.P$D23 32.02,13.31 32.27,13.31 32.65,13.69 33.03,13.69 33.92,12.8 33.92,9.88 C16.1
DN
  Top 0.127: J3.A7 25.16,27.66 25.16,27.15 25.41,26.9 25.92,26.9 26.05,27.02 26.05,27.66 J3.B7 26.05,27.79 26.05,28.3 23.64,30.71 18.3,30.71 17.67,30.07 16.65,30.07 D4.1
DP
  Top 0.127: 24.65,28.3 24.65,27.79 J3.B6 | 24.65,28.3 24.91,28.55 25.29,28.55 25.54,28.3 25.54,27.79 J3.A6 | 24.65,28.3 22.49,30.45 18.43,30.45 18.3,30.33 18.3,29.44 17.03,28.17 16.65,28.17 D4.3
EPD_3V3  (via drill 0.3)
  Top 0.127: v16.27,8.1 16.27,6.58 17.67,5.18 EPD_C3.2 | v11.57,15.34 11.19,15.34 10.94,15.6 10.55,15.6 J1.16 10.55,15.72 10.55,16.1 J1.15 | 32.52,18.01 35.06,15.47 35.06,14.71 C1-EP-DR.1 | 32.52,18.01 32.52,19.66 34.94,22.07 36.21,22.07 36.97,22.83 36.97,23.85 40.27,27.15 | 40.27,27.15 36.34,31.09 L5.2 | 40.27,27.15 DMG2305UX-7.3 | v30.11,16.99 31.51,16.99 32.52,18.01
  Bottom 0.127: v11.57,15.34 11.57,14.96 13.73,12.8 13.73,10.64 v16.27,8.1 16.52,8.1 23.76,15.34 28.46,15.34 v30.11,16.99
GDR  (via drill 0.3)
  Top 0.127: v15,10.01 13.6,10.01 R2_EP_DR.2 | v27.57,22.83 28.21,22.83 28.46,22.58 Q1.1 | v12.08,22.71 10.55,22.71 J1.2
  Bottom 0.127: v15,10.01 18.05,10.01 23.64,15.6 27.19,15.6 27.57,15.98 27.57,16.23 25.92,17.88 25.67,17.88 25.29,18.26 25.29,20.42 | 25.29,20.42 27.57,22.71 v27.57,22.83 | v12.08,22.71 12.33,22.71 14.74,25.12 18.43,25.12 23.13,20.42 25.29,20.42
GND  (via drill 0.3)
  Top 0.127: 35.32,4.55 34.68,5.18 34.68,5.69 C7.2 | 35.32,4.55 35.32,4.29 SW2.1 35.32,4.55 | 35.32,4.55 36.34,5.56 39.89,5.56 40.27,5.18 40.78,5.18 41.41,5.82 41.8,5.82 J2.3 41.92,5.94 43.07,5.94 J2.5 43.19,5.94 43.57,5.94 44.08,6.45 44.84,6.45 45.48,7.09 45.48,9.5 42.43,12.55 42.43,14.58 41.03,15.98 v37.99,15.98 37.48,15.98 | 40.27,19.53 41.29,18.52 IC4.B1 | 40.27,19.53 40.27,21.18 C30.1 40.27,21.31 40.27,21.56 41.92,23.21 C31.1 | C4.2 36.08,13.18 36.08,14.58 C1-EP-DR.2 36.21,14.71 37.48,15.98 | 37.48,15.98 37.48,17.37 C11.1 37.61,17.5 38.11,18.01 38.49,18.01 40.02,19.53 40.27,19.53 | 31,13.05 31.26,12.8 31.89,12.8 U$1.P$F23 32.02,12.8 32.14,12.67 32.65,12.67 33.67,11.66 33.67,10.64 33.41,10.39 33.41,9.37 33.54,9.24 34.43,9.24 34.94,9.75 C16.2 | 27.7,14.07 27.7,13.44 27.45,13.18 | 27.7,14.07 27.32,14.45 27.32,15.34 27.7,15.72 R1_USB.1 | 27.7,14.07 U$1.P$B7 | 27.45,10.64 27.45,9.63 U$1.P$87 | 27.45,10.64 U$1.P$83 | 27.45,10.64 U$1.P$74 | 28.08,12.55 27.45,11.91 U$1.P$79 | 27.45,13.18 U$1.P$75 | 27.45,13.18 U$1.P$74 | 29.73,9.5 28.71,9.5 U$1.P$88 | U$1.P$84 28.59,10.77 28.59,11.02 U$1.P$74 | 29.73,9.5 U$1.P$89 29.86,9.5 30.87,9.5 U$1.P$90 | 29.73,9.5 U$1.P$74 | U$1.P$85 29.73,10.64 29.48,10.39 U$1.P$74 | 28.59,11.91 U$1.P$80 U$1.P$74 | U$1.P$81 29.86,11.91 U$1.P$74 | 28.08,12.55 28.59,13.05 U$1.P$76 | 28.08,12.55 U$1.P$74 | U$1.P$77 29.86,13.05 30.37,12.55 30.49,12.55 U$1.P$74 | 31,11.79 31,10.77 U$1.P$86 | 31,11.79 U$1.P$82 | 31,11.79 U$1.P$74 | v42.81,18.39 42.3,18.39 IC4.B3 | v38.75,15.21 38.75,14.45 C6.2 | v43.45,21.82 44.34,22.71 TP_BAT_GND.TP | 31,13.05 U$1.P$74 | 31,13.05 U$1.P$78 | EPD_C3.1 17.67,4.16 17.54,4.29 16.02,4.29 EPD_C4.1 15.89,4.42 15.63,4.42 14.24,5.82
  Top 0.127: 18.3,4.67 18.3,6.71 C28.2 | 18.3,4.67 17.79,4.16 EPD_C3.1 | 18.3,4.67 19.06,3.91 19.44,3.91 C13.2 | C36.1 19.7,7.97 19.7,7.47 C35.1 19.82,7.34 19.82,7.09 20.84,6.07 20.84,5.56 C9.2 20.84,5.26 20.84,3.91 20.33,3.4 20.33,2.64 19.44,1.75 19.19,1.75 18.55,1.12 EPD_C1.1 18.43,1.12 17.92,1.62 17.79,1.62 | EPD_C2.1 15.38,1.88 17.03,1.88 17.16,1.75 EPD_C10.1 17.29,1.62 17.79,1.62 | 17.79,1.62 17.79,4.04 EPD_C3.1 | 11.44,7.09 11.44,5.94 EPD_C6.1 11.44,5.82 11.95,5.31 13.47,5.31 | 11.44,7.09 11.82,7.47 EPD_C7.1 | 8.65,7.47 8.65,5.82 EPD_C5.1 8.65,5.69 8.14,5.18 4.46,5.18 3.7,5.94 3.7,8.61 | 8.65,7.47 8.52,7.59 EPD_C9.1 8.65,7.47 | 8.65,7.47 9.92,7.47 EPD_C8.1 10.05,7.47 10.43,7.09 11.44,7.09 | 13.47,5.31 13.47,4.29 SW1.1 | 13.47,5.31 13.47,5.69 | 13.47,5.69 13.47,7.34 13.86,7.72 13.86,8.61 13.09,9.37 13.09,9.88 R2_EP_DR.1 | 14.24,5.82 14.11,5.69 13.47,5.69 | 14.24,5.82 15.13,6.71 15.13,7.09 C29.2 | 14.49,18.77 14.49,17.5 C15.2 14.36,17.5 11.57,14.71 | 14.49,18.77 15,19.28 C39.1 15.13,19.28 15.63,18.77 16.65,18.77 C22.2 | 13.73,19.53 10.55,19.53 J1.8 | 14.49,18.77 13.73,19.53 | 11.57,14.71 11.19,15.09 10.55,15.09 J1.17 10.43,15.09 10.17,15.09 9.03,13.94 9.03,12.04 7.89,10.9 J1.MP2 7.76,10.77 5.6,8.61 3.7,8.61 | 11.57,14.71 11.82,14.45 11.82,14.07 13.09,12.8 13.09,12.42 R4.1 13.09,12.29 13.47,11.91 13.98,11.91 15.63,13.56 15.63,15.6 16.52,16.48 C24.2 | 3.7,8.61 2.3,8.61 TP_GND.TP | C2.2 3.32,28.8 3.32,27.53 R1.1 3.19,27.41 3.57,27.02 3.95,27.02 4.2,27.28 5.47,27.28 C3.1 5.6,27.28 6.11,26.77 | 6.11,26.77 7.76,25.12 7.76,23.98 J1.MP1 | C1.1 3.82,32.99 5.35,32.99 5.73,33.38 D1.1 5.86,33.5 7.25,33.5
  Top 0.127: 16.27,29.06 16.65,29.06 D4.2 16.27,29.06 | 16.27,29.06 14.49,30.84 14.49,31.34 SJ1.1 14.36,31.47 14.36,33.25 13.35,34.26 13.22,34.26 R_TYPE_SEL.1 13.09,34.26 8.78,34.26 8.01,33.5 7.25,33.5 | 6.11,26.77 7.25,27.91 7.25,33.5 | SW3.1 24.52,4.29 24.52,4.8 24.78,5.05 24.78,5.82 24.27,6.32 C34.2 24.14,6.45 24.14,6.96 23.13,7.97 23.13,9.73 C14.2 23.13,9.86 23.13,10.13 22.24,11.02 22.24,12.42 | IC3.8 20.84,21.06 20.46,21.06 IC3.9 20.46,20.93 v20.46,20.42 | v20.46,17.5 19.82,16.86 C25.2 19.82,16.74 20.46,16.1 20.46,13.56 C26.2 | C37.1 18.3,8.99 18.3,9.37 18.17,9.5 18.17,10.13 18.3,10.26 18.68,10.26 19.06,9.88 C38.2 19.19,9.75 19.32,9.63 20.08,9.63 C27.2 20.21,9.63 20.71,10.13 20.71,11.02 19.95,11.79 19.7,11.79 19.57,11.91 19.57,12.67 20.08,13.18 C26.2 | 22.24,12.42 21.09,12.42 C26.2 | 22.24,12.42 22.87,12.42 C23.2 | 24.91,23.47 24.02,23.47 C32.1 23.89,23.47 23.64,23.21 22.62,23.21 R1_USB1.2 22.49,23.21 22.36,23.21 22.11,23.47 22.11,24.48 22.36,24.74 22.36,24.99 22.49,25.12 22.49,27.41 22.24,27.66 J3.A12_B1 22.11,27.79 21.48,27.79 21.09,28.17 J3.SH4 20.97,28.17 19.32,26.52 19.32,26.01 C12.1 19.19,25.88 19.19,23.98 18.17,22.96 | 24.91,23.47 25.29,23.47 C33.1 | 27.83,18.64 28.46,19.28 C17.2 | 27.83,18.64 26.3,17.12 26.3,16.36 C10.2 | 27.83,18.64 27.7,18.64 26.18,20.17 C20.2 26.05,20.29 24.91,21.44 24.91,23.47 | C21.2 35.45,27.15 34.94,26.64 31.26,26.64 29.73,28.17 J3.SH3 29.6,28.17 29.22,27.79 28.71,27.79 J3.A1_B12 | U1.4 15.89,22.45 16.14,22.45 16.78,23.09 U1.9 | U1.9 16.9,23.09 17.03,22.96 17.67,22.96 U1.6 17.79,22.96 18.17,22.96 | U1.1 15.89,23.85 16.27,23.85 16.9,23.21 U1.9
  Top 0.127: J3.SH1 29.6,32.36 21.09,32.36 J3.SH2 | 18.17,22.96 v18.55,22.58 | 16.27,29.06 15.76,28.55 15.76,23.98 U1.1 | 13.73,19.53 13.73,22.07 15.13,23.47 15.13,23.6 15.38,23.85 15.76,23.85 U1.1
  Bottom 0.127: 40.27,18.39 40.14,18.39 37.86,16.1 | 40.27,18.39 v42.81,18.39 43.45,19.02 v43.45,21.82 | 37.86,16.1 36.59,14.83 31.64,14.83 31,14.2 31,13.18 U$1.P$78 | 37.86,16.1 v37.99,15.98 v38.75,15.21 | v20.46,17.5 v20.46,20.42 20.46,20.68 v18.55,22.58 | J3.SH1 29.73,32.36 29.73,28.3 J3.SH3 29.73,28.17 29.73,23.98 30.62,23.09 30.87,23.09 31.51,23.72 37.61,23.72 40.27,21.06 40.27,18.39 | J3.SH2 21.09,32.36 21.09,28.3 J3.SH4
IMU_INT1
  Top 0.127: U$1.P$N1 25.92,11.02 25.16,11.02 23.76,12.42 23.76,17.63 21.48,19.91 IC3.5
IMU_INT2  (1 unrouted)
LX1  (via drill 0.3)
  Top 0.127: IC2.B2 16.4,11.79 16.78,11.79 IC2.B3 16.9,11.79 17.41,11.79 17.79,12.17 17.79,12.42 17.41,12.8 16.02,12.8 v14.74,11.53 | v8.78,9.75 7.12,9.75 4.59,7.21 L1.1
  Route15 0.127: v14.74,11.53 14.74,11.15 13.35,9.75 v8.78,9.75
LX2  (via drill 0.3)
  Top 0.127: IC2.D2 16.4,11.02 16.78,11.02 IC2.D3 16.9,11.02 17.41,11.53 17.54,11.53 18.05,12.04 18.05,12.55 17.29,13.31 v16.27,13.31 | v7.63,6.58 7.25,6.58 6.74,7.09 L1.2
  Route15 0.127: v16.27,13.31 16.27,12.17 11.32,7.21 8.27,7.21 v7.63,6.58
N$1
  Top 0.127: IC1.D1 5.73,29.69 5.73,29.44 3.82,27.53 R1.2
N$2
  Top 0.127: IC2.D1 16.02,11.02 14.24,11.02 13.6,11.66 12.71,11.66 12.46,11.4 12.46,9.5 13.47,8.48 R2.2
N$3
  Top 0.127: IC2.E1 16.02,10.64 13.98,10.64 13.47,11.15 R3.2
N$4
  Top 0.127: R4.2 13.73,12.42 15.38,14.07 15.38,16.36 16.9,17.88 18.3,17.88 19.82,19.41 IC3.1
N$5
  Top 0.127: 16.02,11.4 16.02,11.79 IC2.B1 | 16.02,11.4 IC2.C2 | 16.02,11.4 IC2.C1
N$15  (via drill 0.3)
  Top 0.127: v25.16,14.32 25.92,13.56 U$1.P$C1 | v24.52,16.61 25.03,16.61 25.29,16.36 C10.1
  Route15 0.127: v25.16,14.32 25.16,15.98 v24.52,16.61
N$16  (via drill 0.3)
  Top 0.127: v26.18,14.71 26.3,14.58 26.3,13.94 26.43,13.82 26.43,13.31 U$1.P$D2 | C11.2 38.62,17.5 v39.13,18.01 39.38,18.01 42.43,14.96 44.08,14.96 X2.1
  Bottom 0.127: v26.18,14.71 29.73,14.71 29.86,14.58 30.11,14.58 31.76,16.23 31.76,17.5 34.43,20.17 37.22,20.17 39.13,18.26 v39.13,18.01
N$17  (via drill 0.3)
  Top 0.127: v25.67,12.93 26.05,12.93 26.18,12.8 26.43,12.8 U$1.P$F2 | v42.94,13.69 44.08,12.55 X2.2 | v18.3,24.61 18.3,25.88 C12.2
  Route15 0.127: v23.13,16.1 23.13,15.21 25.41,12.93 v25.67,12.93
  Bottom 0.127: v25.67,12.93 25.67,11.79 26.68,10.77 26.68,9.37 27.19,8.86 31.26,8.86 31.64,9.24 31.64,13.69 31.38,13.94 31.38,14.2 31.76,14.58 42.05,14.58 v42.94,13.69 | v18.3,24.61 18.3,23.85 23.13,19.02 v23.13,16.1
N$18  (via drill 0.3)
  Top 0.127: v25.03,8.48 27.19,8.48 U$1.P$AC5 | v22.62,8.99 22.53,8.9 C14.1
  Bottom 0.127: v25.03,8.48 23.13,8.48 v22.62,8.99
N$19  (via drill 0.3)
  Top 0.127: v18.17,15.6 16.65,15.6 C24.1 | v19.19,15.21 19.7,15.72 C25.1 | U$1.P$B5 27.19,14.07 27.19,14.2 27.06,14.32 v27.06,16.1 27.06,16.99 28.46,18.39 C17.1 28.59,18.26 28.71,18.14 29.86,18.14 | v32.91,13.18 32.78,13.05 32.52,13.05 U$1.P$E24 | 29.86,18.14 v30.62,18.14 | 29.86,18.14 29.86,23.34 31.76,25.25 33.41,25.25 34.94,23.72 34.94,23.21 L4.2
  Route15 0.127: v32.91,13.18 32.91,15.85 v30.62,18.14
  Bottom 0.127: v18.17,15.6 18.81,15.6 v19.19,15.21 22.87,15.21 23.76,16.1 v27.06,16.1
N$20  (via drill 0.3)
  Top 0.127: v32.02,15.34 32.02,14.58 U$1.P$A23 | v33.03,18.14 33.03,19.15 33.16,19.28 C18.1 33.29,19.41 33.8,19.91 34.81,19.91 38.88,23.98 v39.26,23.98 | v41.41,26.14 42.18,26.9 43.83,26.9 44.34,26.39 44.72,26.39 X1.3
  Bottom 0.127: v32.02,15.34 32.02,17.12 v33.03,18.14 | v39.26,23.98 v41.41,26.14
N$21
  Top 0.127: X1.2 44.72,25.25 44.34,25.25 43.32,26.26 X1.4 43.19,26.26 41.92,24.99 41.92,23.85 38.88,20.8 38.88,19.41 C19.2 38.75,19.28 38.11,18.64 37.48,18.64 36.84,19.28 34.3,19.28 C18.2
N$22  (via drill 0.3)
  Top 0.127: v33.8,15.34 32.52,14.07 U$1.P$B24 | 37.35,19.66 37.48,19.66 37.73,19.41 C19.1 | 37.35,19.66 v37.1,19.66 | 37.35,19.66 40.02,22.33 40.02,25.37 41.8,27.15 45.1,27.15 45.48,26.77 45.48,24.61 45.35,24.48 43.95,24.48 43.32,25.12 X1.1
  Bottom 0.127: v33.8,15.34 33.8,16.36 v37.1,19.66
N$23  (via drill 0.3)
  Top 0.127: 29.6,17.12 29.6,16.86 29.98,16.48 30.24,16.48 30.49,16.74 33.03,16.74 34.3,15.47 34.3,12.17 35.57,10.9 35.57,9.37 35.19,8.99 33.41,8.99 33.16,9.24 33.16,10.52 33.41,10.77 33.41,11.53 32.52,12.42 32.4,12.42 32.27,12.29 32.02,12.29 U$1.P$H23 | 29.6,17.12 30.11,17.63 30.75,17.63 32.02,18.9 32.02,23.85 32.91,24.74 L2.1 | v26.81,18.52 26.18,19.15 C20.1 | v28.59,17.5 29.22,17.5 29.6,17.12
  Bottom 0.127: v26.81,18.52 27.57,18.52 v28.59,17.5
N$24  (via drill 0.3)
  Top 0.127: 35.06,27.79 35.95,27.79 36.08,27.66 36.08,26.77 35.19,25.88 33.03,25.88 L2.2 32.91,25.76 32.65,25.5 v28.33,25.5 | 35.06,27.79 34.56,27.28 C21.1 | v24.4,21.56 24.27,21.69 19.95,21.69 18.05,19.79 16.78,19.79 C22.1 | 35.06,27.79 34.43,28.42 34.43,33.76 34.68,34.01 36.84,34.01 36.97,33.88 36.97,33.76 39.51,31.22 ANT1.1
  Route15 0.127: v28.33,25.5 v24.4,21.56
N$25  (via drill 0.3)
  Top 0.127: v32.91,11.02 32.52,11.02 U$1.P$N24 | v24.65,9.75 23,11.4 C23.1
  Bottom 0.127: v32.91,11.02 32.91,9.75 31.51,8.36 26.05,8.36 v24.65,9.75
N$26  (via drill 0.3)
  Top 0.127: v25.79,18.39 25.79,15.85 26.68,14.96 26.68,14.07 U$1.P$B3 | v32.52,22.33 36.08,22.33 36.46,22.71 36.46,24.36 36.08,24.74 L3.1
  Bottom 0.127: v25.79,18.39 25.79,20.42 27.7,22.33 v32.52,22.33
N$27  (via drill 0.3)
  Top 0.127: v29.98,15.09 29.98,14.96 30.37,14.58 U$1.P$A18 | v22.49,5.44 22.49,6.96 20.97,8.48 20.97,11.53 C26.1
  Route15 0.127: v29.98,15.09 29.73,15.09 28.46,13.82 27.19,13.82 26.68,13.31 26.68,7.97 27.32,7.34 27.32,6.83 25.29,4.8 23.13,4.8 v22.49,5.44
N$28
  Top 0.127: L4.1 35.95,23.21 35.95,23.98 35.45,24.48 35.45,25.25 35.95,25.76 L3.2
N$29
  Top 0.127: D1.2 9.16,33.38 8.78,32.99 8.78,30.58 C2-EP-DR.1 8.78,30.45 9.28,29.95 10.05,29.95 12.59,27.41 14.74,27.41 D2.1
N$30  (via drill 0.3)
  Top 0.127: D3.2 31,19.53 30.75,19.79 30.75,21.82 Q1.3 30.75,21.95 v30.75,23.6 | v11.7,30.58 9.79,30.58 C2-EP-DR.2 | v18.55,31.22 31.64,31.22 L5.1
  Bottom 0.127: v11.7,30.58 17.92,30.58 v18.55,31.22 18.55,31.34 20.84,33.63 29.98,33.63 30.75,32.87 v30.75,23.6
N$31  (via drill 0.3)
  Top 0.127: v8.52,12.55 8.52,20.04 10.05,21.56 10.43,21.56 J1.4 | v14.36,3.78 15.25,2.89 EPD_C2.2
  Route15 0.127: v8.52,12.55 8.52,12.17 8.65,12.04 8.65,10.52 7.63,9.5 7.63,7.47 7,6.83 7,5.82 8.39,4.42 13.73,4.42 v14.36,3.78
N$33  (via drill 0.3)
  Top 0.127: v9.54,20.42 9.54,20.55 10.05,21.06 10.43,21.06 J1.5 | v17.79,1.12 17.79,0.86 18.17,0.48 18.94,0.48 19.44,0.99 EPD_C1.2
  Route15 0.127: v13.98,6.2 13.98,5.94 17.79,2.13 v17.79,1.12
  Bottom 0.127: v9.54,20.42 9.54,14.58 10.94,13.18 10.94,9.24 v13.98,6.2
N$34  (via drill 0.3)
  Top 0.127: v15.25,8.48 15.89,7.85 15.89,5.31 EPD_C4.2 | v11.32,14.32 11.06,14.58 10.55,14.58 J1.18
  Bottom 0.127: v15.25,8.48 15.25,8.74 13.47,10.52 13.47,12.17 v11.32,14.32
N$35  (via drill 0.3)
  Top 0.127: v9.66,6.58 9.66,5.82 EPD_C5.2 | v9.28,10.64 9.28,13.82 9.66,14.2 10.43,14.2 J1.19
  Bottom 0.127: v9.66,6.58 9.66,10.26 v9.28,10.64
N$36
  Top 0.127: J1.20 10.55,13.56 11.44,13.56 12.21,12.8 12.21,9.12 12.46,8.86 12.46,5.94 EPD_C6.2
N$37  (via drill 0.3)
  Top 0.127: v29.1,15.34 27.83,15.34 R1_USB.2 | v27.83,21.82 26.68,22.96 26.68,27.66 J3.A5
  Bottom 0.127: v29.1,15.34 30.62,16.86 30.62,17.5 27.83,20.29 v27.83,21.82
N$38
  Top 0.127: 12.46,32.99 11.82,32.99 R1_EP_DR.1 | 12.46,32.99 13.09,33.63 R_TYPE_SEL.2 | 12.46,32.99 12.46,31.85 12.84,31.47 SJ1.2
N$39
  Top 0.127: EPD_C9.2 8.52,8.61 8.52,8.86 9.92,10.26 9.92,11.91 10.05,12.04 10.43,12.04 J1.23
N$40  (via drill 0.3)
  Top 0.127: v14.11,4.93 14.24,4.93 16.4,2.77 17.16,2.77 EPD_C10.2 | v8.01,5.69 8.01,6.32 8.14,6.45 8.14,6.83 7.76,7.21 7.76,7.97 7.89,8.1 8.9,8.1 9.41,8.61 9.41,9.37 10.43,10.39 10.43,11.53 J1.24
  Route15 0.127: v14.11,4.93 8.78,4.93 v8.01,5.69
N$42
  Top 0.127: IC4.A2 41.8,19.02 41.8,20.17 40.78,21.18 C30.2
N$47
  Top 0.127: R1_USB1.1 22.62,23.72 22.62,24.87 23.64,25.88 23.64,27.66 J3.B5
OUT+
  Top 0.127: IC4.A3 42.3,19.02 43.7,19.02 44.34,19.66 TP_OP.TP
P0.13/1.5D  (via drill 0.3)
  Top 0.127: v7.89,21.95 10.68,24.74 13.09,24.74 R7.1 | v10.55,5.82 10.55,4.29 SW1.2 10.55,4.16 11.32,3.4 v12.71,3.4 | v20.71,6.96 20.33,7.34 C35.2
  Bottom 0.127: v7.89,21.95 7.89,13.82 10.55,11.15 v10.55,5.82 | v20.71,6.96 20.97,6.96 21.98,5.94 21.98,5.69 20.59,4.29 13.6,4.29 v12.71,3.4
P0.14/1.5D  (via drill 0.3)
  Top 0.127: v14.87,24.61 14.11,24.61 R8.1 | v20.46,8.86 20.46,8.36 20.21,8.1 C36.2 | v31.13,4.29 32.52,4.29 SW2.2
  Route15 0.127: v18.17,13.05 18.17,11.79 20.46,9.5 v20.46,8.86
  Bottom 0.127: v14.87,24.61 17.16,24.61 20.97,20.8 20.97,17.37 19.7,16.1 18.05,16.1 17.67,15.72 17.67,13.56 v18.17,13.05 | v31.13,4.29 30.11,4.29 26.81,7.59 26.05,7.59 25.92,7.47 21.86,7.47 v20.46,8.86
P1.01/1.6C  (via drill 0.3)
  Top 0.127: v14.74,26.01 13.6,24.87 13.6,23.85 13.86,23.6 13.98,23.6 R_PWR_EPD.1 | v37.48,23.21 39.26,24.99 DMG2305UX-7.1
  Bottom 0.127: v14.74,26.01 27.19,26.01 30.37,22.83 37.1,22.83 v37.48,23.21
P1.02/1.6C  (via drill 0.3)
  Top 0.127: v8.01,11.79 8.01,21.44 10.3,23.72 11.44,23.72 11.57,23.6 13.09,23.6 R9.1 | v18.81,8.36 18.81,8.74 18.94,8.86 C37.2 | v21.48,5.82 21.48,4.29 SW3.2
  Bottom 0.127: v8.01,11.79 8.01,6.83 8.52,6.32 8.52,3.66 8.9,3.28 9.16,3.28 11.32,5.44 15.51,5.44 17.67,7.59 | 17.67,7.59 18.43,8.36 v18.81,8.36 | v21.48,5.82 19.44,5.82 17.67,7.59
PMIC_INT  (1 unrouted)
PREVGH  (via drill 0.3)
  Top 0.127: 11.06,12.93 11.82,12.17 11.82,8.61 EPD_C7.2 | 11.06,12.93 10.94,13.05 10.55,13.05 J1.21 | v27.57,16.86 28.46,15.98 31,15.98 D3.1 | 11.06,12.93 v11.44,12.93
  Route15 0.127: v27.57,16.86 25.16,16.86 22.24,19.79 19.57,19.79 19.32,20.04 18.55,20.04 v11.44,12.93
PREVGL  (via drill 0.3)
  Top 0.127: EPD_C8.2 10.05,8.61 10.05,9.63 11.19,10.77 11.19,12.29 10.94,12.55 10.55,12.55 J1.22 10.43,12.67 10.17,12.67 9.79,13.05 v9.79,13.69 | v8.14,22.96 11.32,26.14 11.32,27.28 D2.2
  Bottom 0.127: v8.14,22.96 8.14,22.33 9.03,21.44 9.03,14.45 v9.79,13.69
RESE  (via drill 0.3)
  Top 0.127: v11.19,31.98 11.19,32.87 R1_EP_DR.2 | v11.32,22.2 10.55,22.2 J1.3 | v26.3,22.07 27.06,21.31 28.46,21.31 Q1.2
  Bottom 0.127: 11.19,25.37 11.19,23.72 10.81,23.34 10.81,22.71 v11.32,22.2 | 11.19,25.37 v11.19,31.98 | v26.3,22.07 21.86,22.07 18.55,25.37 11.19,25.37
RESET  (via drill 0.3)  (1 unrouted)
  Top 0.127: v44.21,8.61 43.19,7.59 43.19,7.21 J2.6 | v28.64,7.3 29.1,6.84 TP_RESET.TP
  Bottom 0.127: v44.21,8.61 42.54,6.94 29,6.94 v28.64,7.3
SCL/1.4C  (via drill 0.3)
  Top 0.127: v39.76,18.64 40.4,18.01 41.29,18.01 IC4.C1 | v18.94,26.77 18.94,26.64 18.81,26.52 18.81,24.1 18.17,23.47 17.79,23.47 U1.7
  Route15 0.127: v39.76,18.64 33.41,18.64 31.76,20.29 28.84,20.29 28.21,20.93 24.14,20.93 18.94,26.14 v18.94,26.77
SCL/2.4C  (via drill 0.3)  (1 unrouted)
  Top 0.127: v5.22,30.45 5.73,30.45 IC1.B1 | v13.47,14.07 13.47,13.56 R5.2 | v13.35,7.85 12.97,8.23 12.97,8.36 R2.1 | v19.06,19.41 19.57,19.91 19.82,19.91 IC3.12 | v23.76,7.97 26.68,5.05 26.68,4.67 TP_SCL.TP
  Route15 0.127: v13.35,7.85 15.63,7.85 16.52,6.96 19.44,6.96 21.09,8.61 | 21.09,8.61 21.09,11.02 17.92,14.2 13.6,14.2 v13.47,14.07 | v23.76,7.97 21.73,7.97 21.09,8.61
  Bottom 0.127: v5.22,30.45 5.22,30.2 10.3,25.12 10.3,17.25 v13.47,14.07 18.81,19.41 v19.06,19.41
SDA/1.4C  (1 unrouted)
SDA/2.4C  (via drill 0.3)
  Top 0.127: v25.29,11.53 25.92,11.53 U$1.P$L1 | v25.79,7.97 25.79,7.21 28.97,4.04 28.97,3.4 TP_SDA.TP | v5.22,29.56 5.73,30.07 IC1.C1 | v12.97,10.64 12.97,11.15 R3.1 | v14.11,13.44 14.11,14.07 13.6,14.58 R6.2 | v19.82,18.77 20.33,19.28 20.33,19.41 IC3.2
  Route15 0.127: v25.79,7.97 25.79,8.61 25.29,9.12 v25.29,11.53 24.78,12.04 24.65,12.04 19.82,16.86 v19.82,18.77 | v14.11,13.44 14.11,12.42 12.97,11.28 v12.97,10.64
  Bottom 0.127: v5.22,29.56 5.22,26.77 10.05,21.95 10.05,14.96 12.97,12.04 v12.97,10.64 | v19.82,18.77 19.44,18.77 v14.11,13.44
SWDCLK  (via drill 0.3)
  Top 0.127: v32.91,8.86 32.78,8.99 32.52,8.99 U$1.P$AA24 | v35.7,11.4 37.22,11.4 38.24,12.42 | 38.24,12.42 38.49,12.67 TP_SWDCLK.TP 38.24,12.42 | 38.24,12.42 40.78,9.88 40.78,8.48 41.8,7.47 41.8,7.21 J2.4
  Bottom 0.127: v32.91,8.86 33.16,8.86 v35.7,11.4
SWDIO
  Top 0.127: U$1.P$AC24 32.52,8.61 33.29,7.85 35.06,7.85 TP_SWDIO.TP 35.19,7.72 35.45,7.47 39.51,7.47 39.76,7.21 40.53,7.21 J2.2
SWO
  Top 0.127: U$1.P$AD22 31.51,7.97 TP_SWO.TP
VBAT/1.2A
  Top 0.127: U1.2 15.89,23.34 15.89,22.96 U1.3 15.76,22.83 15.38,22.83 15.13,22.58 15.13,22.33 15.38,22.07 19.57,22.07 21.22,23.72 | 21.22,23.72 22.24,22.71 22.75,22.71 22.87,22.83 23.89,22.83 C32.2 | 21.22,23.72 21.22,25.25 TP_VBAT.TP
VBAT/2.5C
  Top 0.127: IC1.C2 6.24,30.07 6.36,30.07 6.62,29.82 6.62,27.91 6.11,27.41 C3.2
VBUS/1.5D  (via drill 0.3)
  Top 0.127: J3.A9_B4 23,28.3 23.13,28.42 23.13,28.68 | 23.13,28.68 23.13,29.06 22.62,29.56 19.95,29.56 19.44,29.06 19.19,29.06 D4.5 | 29.22,20.8 26.94,20.8 25.41,22.33 25.41,22.83 C33.2 | 29.22,20.8 29.35,20.93 29.35,23.85 27.83,25.37 27.83,27.66 J3.A4_B9 27.7,27.79 27.7,28.17 27.19,28.68 v26.3,28.68 | v23.38,5.44 24.14,5.44 C34.1 | 29.22,20.8 v29.22,19.53 | v23.51,28.68 23.13,28.68
  Route15 0.127: v23.38,5.44 24.14,5.44 26.43,7.72 26.43,14.07 29.22,16.86 v29.22,19.53
  Bottom 0.127: v26.3,28.68 v23.51,28.68
VBUS/2.6D  (via drill 0.3)
  Top 0.127: 2.68,28.3 2.81,28.42 2.81,29.44 4.59,31.22 5.98,31.22 6.24,30.96 IC1.A2 | 2.68,28.3 1.92,28.3 1.79,28.42 1.79,30.33 3.7,32.23 C1.2 | v26.68,7.09 26.43,7.34 26.43,7.97 U$1.P$AD2 | v18.3,7.59 18.05,7.59 17.29,6.83 C28.1 | 2.68,28.3 2.68,27.41 4.97,25.12 v6.24,25.12
  Route15 0.127: v6.24,25.12 6.87,25.12 10.68,21.31 10.68,12.04 12.71,10.01 13.22,10.01 14.11,10.9 14.11,12.04 16.02,13.94 16.52,13.94 16.9,13.56 16.9,12.8 16.65,12.55 16.65,9.24 v18.3,7.59
  Bottom 0.127: v26.68,7.09 21.22,7.09 20.71,7.59 v18.3,7.59
VREG  (via drill 0.3)
  Top 0.127: 6.62,30.84 6.36,30.58 6.24,30.58 IC1.B2 | 6.62,30.84 6.62,31.09 6.24,31.47 4.46,31.47 2.43,29.44 2.43,28.93 C2.1 | 16.4,12.17 16.02,12.17 IC2.A1 | 16.4,12.17 16.78,12.17 IC2.A3 16.78,12.29 v17.29,12.29 | 16.4,12.17 IC2.A2 | v19.57,8.86 19.57,8.99 19.19,9.37 18.81,9.37 18.55,9.63 18.55,9.75 C38.1 | v15.76,20.29 15.13,20.29 C39.2 | v15.63,32.49 16.9,32.49 TP_VREG.TP | v6.74,30.84 6.62,30.84
  Route15 0.127: v19.57,8.86 19.57,10.01 v17.29,12.29
  Bottom 0.127: v17.29,12.29 14.62,12.29 13.6,13.31 13.6,13.56 13.98,13.94 14.24,13.94 19.57,19.28 19.57,19.53 18.81,20.29 v15.76,20.29 12.59,20.29 10.55,22.33 10.55,30.84 | v15.63,32.49 11.06,32.49 10.55,31.98 10.55,30.84 | 10.55,30.84 v6.74,30.84